# Altium PCB PCB2.PcbDoc (part 2 of 2)
Units mm, origin at the board's own origin, x right, y up, seen from the top; angles counter-clockwise.
Board outline 392.94 x 181.74 mm, 2 copper layers (Top Layer, Bottom Layer); 104 components, 82 nets, 455 pads, 733 vias.
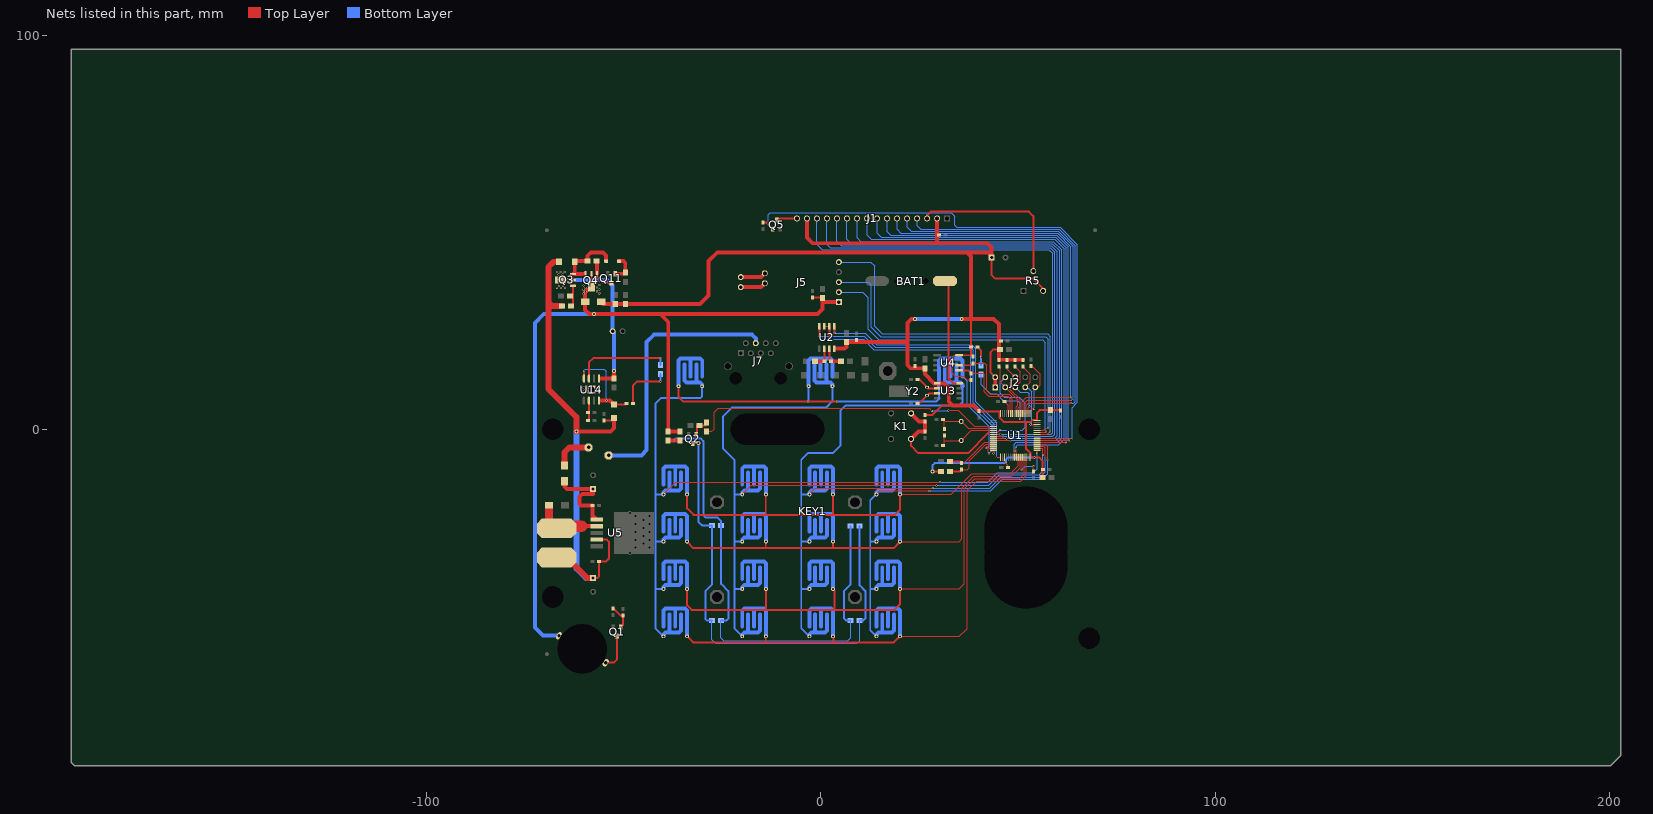
[diagram p2: the nets of this part, all layers, seen from the top]

## Via types
v1: diameter 0.5, hole 0.3, Top Layer to Bottom Layer, tented both sides, 719 vias
v2: diameter 1, hole 0.5, Top Layer to Bottom Layer, tented both sides, 9 vias
v3: diameter 1, hole 0.7, Top Layer to Bottom Layer, tented both sides, 5 vias

## Nets (pads, with @x,y where several pads share a name; then routed paths per layer and width w, separated by ;. In a path a pad name is that pad's centre, name@x,y a point inside that pad or via, vN(x,y) a via of type N, cw(c..) or ccw(c..) an arc to the next point about the centre after c; other vN are vias at no path point) (continued)
I2C1_SCL: R12.1 U1.58 U4.6 | length 24.9
  Top Layer w0.254: R12.1@38.6,16.764 41.536,16.764 42,16.3 42,9.8 42.9,8.9 47.8,8.9 48.526,8.174 U1.58@48.526,4.374
  Top Layer w0.5: U4.6@35.052,16.256 38.092,16.256 R12.1@38.6,16.764
I2C1_SDA: R13.1 U1.59 U4.5 | length 22.2
  Top Layer w0.254: R13.1@38.1,14.224 40.976,14.224 41.4,13.8 41.4,9.5 42.5,8.4 47.4,8.4 48.026,7.774 U1.59@48.026,4.026
  Top Layer w0.5: U4.5@35.052,14.986 37.338,14.986 R13.1@38.1,14.224
JTCK: J2.9 R8.1 U1.49 | length 15
  Top Layer w0.254: U1.49@53.026,4.026 53.026,4.817 53.416,5.207 v1(54.077,5.207) ; R8.1@53.226,16.126 53.474,16.126 55.6,14 55.6,11.3 54.968,10.668 J2.9@54.356,10.668
  Bottom Layer w0.254: v1(54.077,5.207) 54.077,10.389 J2.9@54.356,10.668
JTDI: J2.5 R6.2 U1.50 | length 15.7
  Top Layer w0.254: R6.2@49.162,15.999 50.5,14.661 50.5,11.892 J2.5@49.276,10.668 ; U1.50@52.526,4.026 52.526,5.434 v1(52.832,5.74)
  Bottom Layer w0.254: J2.5@49.276,10.668 50.495,9.449 52.4,9.449 52.832,9.017 v1(52.832,5.74)
JTDO: J2.6 R4.2 U1.55 | length 14.6
  Top Layer w0.254: R4.2@47.13,15.999 47.13,15.354 J2.6@49.276,13.208 48,11.932 48,10.1 50.5,7.6 50.5,5.9 50.026,5.426 U1.55@50.026,4.026
JTMS: J2.7 R7.2 U1.46 | length 19
  Top Layer w0.254: R7.2@51.194,15.999 51.194,15.906 53.1,14 53.1,11.952 J2.7@51.816,10.668 ; v1(53.1,1.2) 53.126,1.226 U1.46@54.826,1.226
  Bottom Layer w0.254: J2.7@51.816,10.668 52.299,10.668 53.467,9.5 53.467,1.567 v1(53.1,1.2)
JTRST: J2.3 R3.2 U1.56 | length 14.1
  Top Layer w0.254: R3.2@45.098,15.999 45.5,15.597 45.5,11.904 J2.3@46.736,10.668 46.736,10.664 49.9,7.5 49.9,6.1 49.526,5.726 U1.56@49.526,4.026
KEY_LED: R19.1 U1.4 | length 79.8
  Top Layer w0.254: R19.1@-29.08,-0.532 -27.632,-0.532 -27.1,0 -27.1,4.3 -26,5.4 27.4,5.4 v1(28.1,4.7) ; v1(32.4,4.8) 34.8,4.8 38.874,0.726 U1.4@43.726,0.726
  Bottom Layer w0.254: v1(28.1,4.7) 32.3,4.7 v1(32.4,4.8)
LCD_LED: Q5.1 R67.2 U1.39 | length 147.6
  Top Layer w0.254: U1.39@54.826,-2.274 v1(63.726,-2.274)
  Top Layer w0.5: R67.2@-14.732,52.451 -13.843,52.451 v1(-13.406,52.014) Q5.1@-12.192,50.8
  Bottom Layer w0.254: v1(-13.406,52.014) -13.406,53.594 -13.406,54.394 -12.9,54.9 33.1,54.9 33.9,54.1 33.9,51.8 34.452,51.248 60.626,51.248 65.047,46.827 65.047,6.829 63.726,5.508 v1(63.726,-2.274) ; v1@-13.4,51.9 v1@-13.4,52.014
NetBAT1_1: BAT1.1 U3.8 | length 28.4
  Top Layer w0.5: BAT1.1@31.462,37.592 32.4,36.654 32.4,12.8 33.516,11.684 U3.8@35.164,11.684
NetBEEP1_2: BEEP1.2 Q1.3 | length 10.1
  Top Layer w0.5: BEEP1.2@-54.585,-59.174 -52.574,-59.174 -51.711,-58.311 -51.711,-53.9 ; -51.711,-54.961 Q1.3@-51.711,-52.457
NetC1_1: C1.1 R2.1 U1.5 Y1.1 | length 15.9
  Top Layer w0.254: C1.1@30.988,2.54 C1.1@31.284,2.244 ; R2.1@31.284,0.084 C1.1@31.284,2.244 ; U1.5@43.726,0.226 37.366,0.226 Y1.1@35.56,2.032 31.496,2.032 C1.1@31.284,2.244
NetC6_1: C6.1 R2.2 U1.6 Y1.2 | length 16.1
  Top Layer w0.254: C6.1@30.988,-4.064 31.284,-3.768 R2.2@31.284,-1.567 ; 31.332,-2.848 Y1.2@35.56,-2.848 38.134,-0.274 U1.6@43.726,-0.274
NetC8_1: C8.1 L2.2 U1.13 | length 14.8
  Top Layer w0.254: C8.1@35.668,-10.216 36.484,-10.216 36.55,-10.15 ; 36.616,-10.216 37.084,-10.216 37.6,-9.7 37.6,-8 41.826,-3.774 U1.13@43.726,-3.774
  Top Layer w0.5: L2.2@32.766,-10.668 35.216,-10.668 C8.1@35.668,-10.216
NetC8_2: C8.2 L1.2 U1.12 | length 13.3
  Top Layer w0.254: C8.2@35.668,-8.565 35.835,-8.565 36.235,-8.565 41.526,-3.274 U1.12@43.726,-3.274
  Top Layer w0.5: L1.2@32.766,-8.128 35.231,-8.128 C8.2@35.668,-8.565
NetC17_2: C17.2 U3.2 Y2.2 | length 5.9
  Top Layer w0.5: C17.2@24.511,12.7 24.892,12.7 Y2.2@26.924,10.668 27.178,10.414 U3.2@29.464,10.414
NetC22_2: C22.2 U3.3 Y2.1 | length 6
  Top Layer w0.5: C22.2@24.511,6.604 24.892,6.604 Y2.1@26.924,8.636 27.432,9.144 U3.3@29.464,9.144
NetC24_1: C24.1 C25.2 D4.2 U5.1 | length 23.1
  Top Layer w1: D4.2@-65.024,-13.194 -65.024,-14.478 -64.374,-15.128 C24.1@-57.772,-15.128 -57.772,-16.345 -58.471,-16.345 -60.541,-16.345 -61.189,-16.993 -61.189,-18.898 -60.826,-19.26 C25.2@-57.919,-19.26 -57.919,-21.837 U5.1@-56.896,-22.86
  Top Layer w1.5: D4.2@-65.024,-13.194 D4.2@-65.01,-13.208
NetD4_1: D4.1 F14.2 | length 9.9
  Top Layer w1.5: D4.1@-65.024,-9.144 -65.024,-5.817 -63.795,-4.588 F14.2@-58.938,-4.588
NetD5_2: D5.2 L3.1 U5.2 | length 16.8
  Top Layer w1: -60.69,-24.56 U5.2@-56.896,-24.56
  Top Layer w2: D5.2@-68.954,-19.5 -68.954,-23.186 L3.1@-67.032,-25.108
  Top Layer w3: L3.1@-67.032,-25.108 -66.484,-24.56 -60.69,-24.56
NetD22_1: D22.1 Q11.1 R73.2 | length 6.9
  Top Layer w1: Q11.1@-52.166,39.462 -49.88,39.462 R73.2@-49.626,39.716 -49.626,42.226 -50.072,42.672 D22.1@-51.206,42.672
NetF1_1: F1.1 R11.1 U2.7 | length 5.9
  Top Layer w0.5: U2.7@2.122,20.484 2.122,17.69 R11.1@2.54,17.272
  Top Layer w1: R11.1@2.54,17.272 F1.1@5.08,17.272
NetF2_1: F2.1 R11.2 U2.6 | length 5.6
  Top Layer w0.5: U2.6@0.852,20.484 0.852,17.309 R11.2@0.889,17.272
  Top Layer w1: F2.1@-1.524,17.272 R11.2@0.889,17.272
NetJ1_3: J1.3 R5.2 | length 42.5
  Top Layer w0.5: J1.3@26.92,53.5 26.92,54.32 27.8,55.2 52.7,55.2 53.848,54.052 R5.2@53.848,40.132
NetJ1_16: J1.16 Q5.3 | length 5.3
  Top Layer w0.5: Q5.3@-11.239,53.086 -10.826,53.5 J1.16@-6.1,53.5
NetLED1_1: LED1.1 LED2.1 LED3.1 LED4.1 R14.2 R15.2 | length 130.5
  Top Layer w1: R15.2@-38.732,-2.818 v1(-37.3,-2.818) R14.2@-36.192,-2.818
  Bottom Layer w0.254: LED4.1@-25.4,-48.45 -25.4,-52.9 -24.7,-53.6 6.8,-53.6 7.5,-52.9 LED3.1@7.5,-48.45
  Bottom Layer w0.5: v1(-37.3,-2.818) -36.782,-2.3 -30.5,-2.3 -29.8,-3 -29.8,-21.8 -29.2,-22.4 -26.2,-22.4 -25.3,-23.3 LED2.1@-25.3,-24.384 -25.3,-39.2 -23.5,-41 -23.5,-48 -23.95,-48.45 LED4.1@-25.4,-48.45 ; LED3.1@7.5,-48.45 6.35,-48.45 5.8,-47.9 5.8,-41 7.5,-39.3 LED1.1@7.5,-24.45
NetLED1_2: LED1.2 LED2.2 LED3.2 LED4.2 Q2.3 | length 125.6
  Top Layer w0.5: Q2.3@-32.429,-3.6 -32.529,-3.5 v2(-31,-3.5)
  Bottom Layer w0.254: LED4.2@-27.686,-48.45 -27.686,-53.314 -26.7,-54.3 9.086,-54.3 9.786,-53.6 LED3.2@9.786,-48.45
  Bottom Layer w0.5: v2(-31,-3.5) -31,-23.5 -30.116,-24.384 LED2.2@-27.586,-24.384 -27.586,-39.286 -29.3,-41 -29.3,-48.1 -28.95,-48.45 LED4.2@-27.686,-48.45 ; LED3.2@9.786,-48.45 10.75,-48.45 11.3,-47.9 11.3,-41.1 9.786,-39.586 LED1.2@9.786,-24.45
NetLED5_1: LED5.1 R18.1 | length 4.9
  Top Layer w0.5: R18.1@39.751,20.828 40.64,19.939 v1(40.64,18.3)
  Bottom Layer w0.5: LED5.1@40.64,16.256 v1(40.64,18.3)
NetLED5_2: LED5.2 U1.54 | length 20
  Top Layer w0.254: v1(50.526,2.6) U1.54@50.526,4.026
  Bottom Layer w0.254: LED5.2@40.64,13.97 40.64,11.26 42.9,9 44.534,9 46.234,7.3 49.9,7.3 50.526,6.674 v1(50.526,2.6)
NetLED10_1: LED10.1 R76.2 | length 13.8
  Top Layer w0.5: R76.2@-47.625,6.604 -47.625,8.625 -47.625,11.175 -46.64,12.16 v1(-40.64,12.16)
  Bottom Layer w0.5: v1(-40.64,12.16) LED10.1@-40.64,14
NetLED10_2: LED10.2 U14.7 | length 24.5
  Top Layer w0.5: U14.7@-58.836,12.886 -58.836,16.964 -57.74,18.06 v1(-40.64,18.06)
  Bottom Layer w0.5: LED10.2@-40.64,16.286 v1(-40.64,18.06)
NetQ1_1: Q1.1 R16.2 R17.2 | length 6.7
  Top Layer w0.5: R17.2@-52.79,-45.472 -52.528,-45.472 -50.75,-47.25 R16.2@-50.25,-47.25 ; Q1.1@-50.758,-50.171 -50.25,-49.663 R16.2@-50.25,-47.25 ; R16.2@-50,-47.25 R16.2@-50.25,-47.25
NetQ2_1: Q2.1 R19.2 R20.2 | length 4.7
  Top Layer w0.5: Q2.1@-31.605,-1.242 -31.493,-1.131 -31.493,0.992 -29.207,0.992 R19.2@-29.08,1.119
NetQ3_1: Q3.1 R71.1 R72.2 | length 5.3
  Top Layer w0.5: R71.1@-63.342,31.334 -62.834,31.842 -62.834,34.636 -62.834,34.9 Q3.1@-62.834,36.414
NetQ4_1: Q4.1 Q11.3 R74.1 | length 8.4
  Top Layer w0.5: Q4.1@-56.738,39.462 -56.738,38.538 -55.376,37.176 Q11.3@-53.119,37.176
  Top Layer w1: R74.1@-56.896,42.672 -56.738,42.514 Q4.1@-56.738,39.462
NetR1_1: R1.1 U1.60 | length 3.5
  Top Layer w0.254: R1.1@46.5,7.112 47.526,6.086 U1.60@47.526,4.026
NetR9_1: R9.1 U1.28 | length 8.1
  Top Layer w0.254: v1(50.8,-10.3) 51.026,-10.074 U1.28@51.026,-7.074 ; R9.1@53.848,-10.668 v1(53.848,-9.348)
  Bottom Layer w0.254: v1(50.8,-10.3) 51.752,-9.348 v1(53.848,-9.348)
NetR75_1: R75.1 R76.1 U14.4 U14.8 | length 22.8
  Top Layer w0.5: U14.8@-60.106,12.886 v1(-60.106,14.494) ; R75.1@-52.486,6.282 -50.7,6.282 -49.598,6.282 R76.1@-49.276,6.604
  Top Layer w1: -55.9,7.3 -53.503,7.3 R75.1@-52.486,6.282
  Bottom Layer w0.254: v1(-60.106,14.494) -60.106,14.994 -59.8,15.3 -55,15.3 -54.4,14.7 v1(-54.4,7.3)
NetR77_1: R77.1 R78.1 U14.2 | length 5.2
  Top Layer w0.5: R78.1@-59.09,2.218 -58.836,2.472 U14.2@-58.836,7.298
PA0: KEY1.33 KEY1.35 KEY1.37 U1.14 | length 100.3
  Top Layer w0.254: v1(41.8,-4.7) 42.226,-4.274 U1.14@43.726,-4.274
  Top Layer w0.5: KEY1.37@-36.107,10.929 -36.107,8.207 -35,7.1 v1(-3.3,7.1) v1(4.1,7.1)
  Bottom Layer w0.254: 35.893,13.429 37.1,12.222 37.1,6.2 42.7,0.6 42.7,-4.4 42.4,-4.7 v1(41.8,-4.7)
  Bottom Layer w0.5: v1(-3.3,7.1) -3.107,7.293 KEY1.35@-3.107,10.929 ; v1(4.1,7.1) 29.3,7.1 29.893,7.693 KEY1.33@29.893,10.929
PA9_U1_TX: J5.2 U1.42 | length 87.3
  Top Layer w0.254: U1.42@54.826,-0.774 56.826,-0.774 v1(57.1,-0.5)
  Bottom Layer w0.254: J5.2@4.557,34.798 10.602,34.798 12,33.4 12,25.4 14.7,22.7 56.2,22.7 56.9,22 56.9,-0.3 v1(57.1,-0.5)
PA10_U1_RX: J5.3 U1.43 | length 90.9
  Top Layer w0.254: U1.43@54.826,-0.274 56.426,-0.274 57,0.3 v1(57.6,0.3)
  Bottom Layer w0.254: J5.3@4.557,37.338 12.062,37.338 12.8,36.6 12.8,25.9 15.2,23.5 57,23.5 57.6,22.9 v1(57.6,0.3)
PB0: KEY1.1 KEY1.3 KEY1.5 KEY1.7 U1.26 | length 108.3
  Top Layer w0.254: KEY1.1@20.043,-16.471 33.029,-16.471 38.2,-11.3 48,-11.3 50.026,-9.274 U1.26@50.026,-7.074
  Top Layer w0.5: KEY1.7@-33.957,-16.471 -33.957,-20.043 -32.3,-21.7 -14,-21.7 ; KEY1.5@-14,-16.514 -14,-21.7 ; 3.043,-21.657 KEY1.3@3.043,-16.471 ; KEY1.1@20.043,-16.471 20.043,-20.4 18.743,-21.7 -14,-21.7
PB1: KEY1.9 KEY1.11 KEY1.13 KEY1.15 U1.27 | length 107.2
  Top Layer w0.254: KEY1.9@20.043,-28.471 35.029,-28.471 35.7,-27.8 35.7,-14.9 38.7,-11.9 48.3,-11.9 50.526,-9.674 U1.27@50.526,-7.074
  Top Layer w0.5: KEY1.15@-33.957,-28.471 -32.328,-30.1 -14,-30.1 ; KEY1.13@-14,-28.514 -14,-30.1 ; KEY1.11@3.1,-28.528 3.1,-30.1 ; KEY1.9@20.214,-28.3 KEY1.9@20.043,-28.471 18.414,-30.1 3.1,-30.1 ; -14,-30.1 3.1,-30.1
PB10: KEY1.17 KEY1.19 KEY1.21 KEY1.23 U1.29 | length 135.7
  Top Layer w0.254: KEY1.17@20.043,-40.471 35.029,-40.471 36.4,-39.1 36.4,-15.1 39,-12.5 50.326,-12.5 51.526,-11.3 U1.29@51.526,-7.074
  Top Layer w0.5: KEY1.23@-33.957,-40.471 -33.957,-44.643 -32.8,-45.8 3.4,-45.8 ; -13.957,-45.757 KEY1.21@-13.957,-40.471 ; KEY1.19@3.043,-40.471 3.4,-40.828 3.4,-45.8 ; KEY1.17@20.043,-40.471 20.043,-44.3 18.543,-45.8 3.4,-45.8
PB11: KEY1.25 KEY1.27 KEY1.29 KEY1.31 U1.30 | length 132.1
  Top Layer w0.254: KEY1.25@20.043,-52.471 35.129,-52.471 37.1,-50.5 37.1,-15.5 39.5,-13.1 50.626,-13.1 52.026,-11.7 U1.30@52.026,-7.074
  Top Layer w0.5: KEY1.31@-33.957,-52.471 -32.428,-54 -14,-54 ; KEY1.29@-14,-52.514 -14,-54 ; KEY1.27@3.2,-52.628 3.2,-54 ; KEY1.25@20.043,-52.471 18.514,-54 3.2,-54 ; -14,-54 3.2,-54
PB12: KEY1.8 KEY1.16 KEY1.24 KEY1.32 KEY1.38 U1.33 | length 183.3
  Top Layer w0.254: KEY1.8@-39.957,-16.471 -36.886,-13.4 v1(30.2,-13.4) ; v1(54.826,-6) U1.33@54.826,-5.274
  Bottom Layer w0.254: v1(30.2,-13.4) 42.3,-13.4 44.7,-11 53.8,-11 54.826,-9.974 v1(54.826,-6)
  Bottom Layer w0.5: -41.971,-16.471 KEY1.8@-39.957,-16.471 ; KEY1.32@-39.957,-52.471 -42,-50.428 -42,-40.471 ; KEY1.24@-39.957,-40.471 -42,-40.471 ; KEY1.16@-39.957,-28.471 -42,-28.471 ; KEY1.38@-30.107,10.929 -30.107,8.393 -30.6,7.9 -40.6,7.9 -42,6.5 -42,-28.471 ; -42,-40.471 -42,-28.471
PB13: KEY1.6 KEY1.14 KEY1.22 KEY1.30 KEY1.36 U1.34 | length 182.4
  Top Layer w0.254: KEY1.6@-19.957,-16.471 -17.686,-14.2 v1(29.3,-14.2) ; U1.34@54.826,-4.774 56.074,-4.774 56.3,-5 v1(56.3,-6.5)
  Bottom Layer w0.254: v1(29.3,-14.2) 42.5,-14.2 45.2,-11.5 55.3,-11.5 56.3,-10.5 v1(56.3,-6.5)
  Bottom Layer w0.5: -21.871,-28.471 KEY1.14@-19.957,-28.471 ; -21.829,-16.471 KEY1.6@-19.957,-16.471 ; -21.771,-40.471 KEY1.22@-19.957,-40.471 ; KEY1.30@-19.957,-52.471 -21.9,-50.528 -21.9,-16.471 -21.9,-7.8 -24.9,-4.8 -24.9,3.2 -22.5,5.6 1.4,5.6 2.9,7.1 KEY1.36@2.9,10.922
PB14: KEY1.4 KEY1.12 KEY1.20 KEY1.28 KEY1.34 U1.35 | length 178.1
  Top Layer w0.254: KEY1.4@-2.957,-16.471 -1.386,-14.9 v1(28.4,-14.9) ; U1.35@54.826,-4.274 56.474,-4.274 56.9,-4.7 v1(56.9,-7.2)
  Bottom Layer w0.254: v1(28.4,-14.9) 42.8,-14.9 45.6,-12.1 55.6,-12.1 56.9,-10.8 v1(56.9,-7.2)
  Bottom Layer w0.5: -4.971,-16.471 KEY1.4@-2.957,-16.471 ; -4.871,-40.471 KEY1.20@-2.957,-40.471 ; -4.871,-28.471 KEY1.12@-2.957,-28.471 ; KEY1.28@-2.957,-52.471 -5,-50.428 -5,-7.7 -3.3,-6 3,-6 4.9,-4.1 4.9,4.7 6.2,6 35,6 35.893,6.893 KEY1.34@35.893,10.929
PB15: KEY1.2 KEY1.10 KEY1.18 KEY1.26 U1.36 | length 95.7
  Top Layer w0.254: KEY1.2@14.043,-16.471 14.914,-15.6 v1(27.5,-15.6) ; U1.36@54.826,-3.774 56.874,-3.774 57.5,-4.4 v1(57.5,-7.8)
  Bottom Layer w0.254: v1(27.5,-15.6) 43.1,-15.6 46,-12.7 56,-12.7 57.5,-11.2 v1(57.5,-7.8)
  Bottom Layer w0.5: 12.529,-28.471 KEY1.10@14.043,-28.471 ; KEY1.18@14.014,-40.5 12.5,-40.5 ; KEY1.26@14.043,-52.471 12.5,-50.928 12.5,-40.5 ; KEY1.2@14.043,-16.471 12.5,-18.014 12.5,-40.5
PC0: J1.14 U1.8 | length 128.9
  Top Layer w0.254: U1.8@43.726,-1.274 v1(45.445,-1.274)
  Bottom Layer w0.254: -1.02,52.635 -1.02,51.8 ; J1.14@-1.02,53.5 -1.02,51.8 ; v1(45.445,-1.274) 58.4,-1.274 58.8,-0.874 58.8,44.6 57.8,45.6 0.3,45.6 -1.02,46.92 -1.02,51.8
PC1: J1.13 U1.9 | length 128.2
  Top Layer w0.254: U1.9@43.726,-1.774 v1(46.148,-1.774)
  Bottom Layer w0.254: 1.52,52.635 1.52,51.6 ; J1.13@1.52,53.5 1.52,51.6 ; v1(46.148,-1.774) 58.826,-1.774 59.308,-1.292 59.308,44.892 58.092,46.108 2.392,46.108 1.52,46.98 1.52,51.6
PC2: J1.12 U1.10 | length 127.7
  Top Layer w0.254: U1.10@43.726,-2.274 v1(47.053,-2.274)
  Bottom Layer w0.254: 4.06,52.635 4.06,50.8 ; J1.12@4.06,53.5 4.06,50.8 ; v1(47.053,-2.274) 59.226,-2.274 59.9,-1.6 59.9,45.1 58.384,46.616 5.084,46.616 4.06,47.64 4.06,50.8
PC3: J1.11 U1.11 | length 126.7
  Top Layer w0.254: U1.11@43.726,-2.774 v1(48.128,-2.774)
  Bottom Layer w0.254: 6.6,52.635 6.6,50.7 ; J1.11@6.6,53.5 6.6,50.7 ; v1(48.128,-2.774) 59.626,-2.774 60.5,-1.9 60.5,45.3 58.676,47.124 7.676,47.124 6.6,48.2 6.6,50.7
PC4: J1.10 U1.24 | length 123.7
  Top Layer w0.254: U1.24@49.026,-7.074 v1(49.026,-5.5)
  Bottom Layer w0.254: 9.14,50.268 9.14,50.44 ; 9.14,52.635 9.14,51 ; J1.10@9.14,53.5 9.14,51 ; v1(49.026,-5.5) 49.026,-3.774 49.5,-3.3 60,-3.3 61.1,-2.2 61.1,45.5 58.968,47.632 10.068,47.632 9.14,48.56 9.14,50.44 ; 9.14,50.44 9.14,51
PC5: J1.9 U1.25 | length 121.6
  Top Layer w0.254: U1.25@49.526,-7.074 v1(49.526,-4.779)
  Bottom Layer w0.254: 11.68,52.635 11.68,50.8 ; J1.9@11.68,53.5 11.68,50.8 ; v1(49.526,-4.779) 49.526,-4.274 49.9,-3.9 60.3,-3.9 61.7,-2.5 61.7,45.8 59.3,48.2 12.7,48.2 11.68,49.22 11.68,50.8
PC6: J1.8 U1.37 | length 111.9
  Top Layer w0.254: U1.37@54.826,-3.274 61.974,-3.274 v1(62.2,-3.5)
  Bottom Layer w0.254: 14.22,52.635 14.22,51 ; J1.8@14.22,53.5 14.22,51 ; v1(62.2,-3.5) 62.208,-3.492 62.208,46.01 59.51,48.708 15.292,48.708 14.22,49.78 14.22,51
PC7: J1.7 U1.38 | length 109.4
  Top Layer w0.254: U1.38@54.826,-2.774 v1@62.9,-2.774
  Bottom Layer w0.254: 16.76,52.635 16.76,51.4 ; J1.7@16.76,53.5 16.76,51.4 ; v1(62.9,-2.8) 62.716,-2.616 62.716,46.284 59.784,49.216 17.7,49.216 16.76,50.156 16.76,51.4
PC10: J1.4 U1.51 | length 99.7
  Top Layer w0.254: U1.51@52.026,4.026 52.026,6.128 52.527,6.629 v1(63.4,6.629)
  Bottom Layer w0.254: 24.38,52.635 24.38,51.62 ; J1.4@24.38,53.5 24.38,51.62 ; v1(63.4,6.629) 64.129,6.629 64.539,7.039 64.539,46.616 60.415,50.74 25.26,50.74 24.38,51.62
PC11: J1.5 U1.52 | length 101.8
  Top Layer w0.254: U1.52@51.526,4.026 51.526,6.644 52.282,7.4 v1(63.8,7.4)
  Bottom Layer w0.254: 21.84,52.635 21.84,51.6 ; J1.5@21.84,53.5 21.84,51.6 ; v1(63.8,7.4) 63.8,7.608 64.031,7.839 64.031,46.406 60.205,50.232 22.868,50.232 21.84,51.26 21.84,51.6
PC12: J1.6 U1.53 | length 104.3
  Top Layer w0.254: U1.53@51.026,4.026 51.026,7.033 52.093,8.1 v1(63.4,8.1)
  Bottom Layer w0.254: 19.3,52.635 19.3,51.1 ; J1.6@19.3,53.5 19.3,51.1 ; v1(63.4,8.1) 63.4,46.318 59.994,49.724 20.276,49.724 19.3,50.7 19.3,51.1
R\E\A\D\Y/BUSY: J5.5 U1.41 | length 97.9
  Top Layer w0.254: U1.41@54.826,-1.274 57.326,-1.274 v1(58.1,-0.5)
  Bottom Layer w0.254: J5.5@4.557,42.418 12.682,42.418 13.6,41.5 13.6,26.2 15.6,24.2 57.5,24.2 58.2,23.5 v1@58.2,-0.4
RESET: C23.1 J2.4 K1.1 R10.1 U1.7 | length 63.5
  Top Layer w0.254: 42.35,-0.95 42.526,-0.774 U1.7@43.726,-0.774 44.826,-0.774 v1(45.4,-0.2)
  Top Layer w0.5: K1.1@22.86,-2.436 22.86,-4.16 24.7,-6 37.3,-6 42.35,-0.95
  Top Layer w1: K1.1@22.86,-2.436 24.788,-0.508 C23.1@26.416,-0.508 R10.1@26.416,2.032 24.892,2.032 K1.1@22.86,4.064
  Bottom Layer w0.254: v1(45.4,-0.2) 51.1,-0.2 51.8,0.5 51.8,6.6 50.3,8.1 46.5,8.1 45.5,9.1 45.5,11.972 J2.4@46.736,13.208
RS485_RE: U1.15 U2.2 U2.3 | length 72.9
  Top Layer w0.254: U2.3@0.852,26.184 U2.2@2.122,26.184 ; v1(42.6,-6.1) 42.4,-5.9 42.4,-5 42.626,-4.774 U1.15@43.726,-4.774
  Top Layer w0.5: v1(2.122,22.8) U2.2@2.122,26.184
  Bottom Layer w0.254: v1(2.122,22.8) 10.8,22.8 13.4,20.2 37.7,20.2 38,19.9 38,6.3 43.4,0.9 43.4,-5.3 v1(42.6,-6.1)
RS485_RX: U1.17 U2.1 | length 69.9
  Top Layer w0.254: v1(44.526,-7.074) U1.17@45.526,-7.074
  Top Layer w0.5: v1@3.392,24.4 U2.1@3.392,26.184
  Bottom Layer w0.254: v1(3.4,24.4) 11.2,24.4 14.2,21.4 38.2,21.4 39.2,20.4 39.2,7 44.526,1.674 v1(44.526,-7.074)
RS485_TX: U1.16 U2.4 | length 72.4
  Top Layer w0.254: v1@43.7,-6.1 v1(43.726,-6.074) U1.16@43.726,-5.274
  Top Layer w0.5: v1@-0.418,23.6 U2.4@-0.418,26.184
  Bottom Layer w0.254: v1(-0.4,23.6) 11,23.6 13.8,20.8 37.9,20.8 38.6,20.1 38.6,6.7 44,1.3 44,-5.8 v1(43.726,-6.074)
SPK+: J5.6 J6.1 | length 6.5
  Top Layer w1: J6.1@-20.32,38.608 -15.212,38.608 J5.6@-14.243,39.578
SPK-: J5.7 J6.2 | length 6.5
  Top Layer w1: J6.2@-20.32,36.068 -15.212,36.068 J5.7@-14.243,37.038
SR: U14.9
  other v1: -59.7,9.3 -56.1,9.3 -60.3,9.7 -56.7,9.7 -59.7,10.1 -56.1,10.1 -56.7,10.5 -60.3,10.6 -59.7,10.9 -56.1,10.9
V1: BEEP1.1 C0.2 C7.2 D23.1 J5.1 pad.24 pad.25 pad.26 pad.27 pad.28 pad.29 pad.30 pad.31 pad.32 pad.33 Q4.2 Q4.4 R14.1 R15.1 | length 213.8
  Top Layer w0.5: Q4.4@-58.238,36.262 Q4.2@-58.238,39.462 ; C0.2@-2.119,33.479 0.294,33.479 C7.2@0.421,33.352
  Top Layer w1: Q4.4@-58.238,36.262 -59.786,34.714 D23.1@-59.786,32.35 -59.786,30.286 -58.7,29.2 v2(-57.5,29.2) -40.7,29.2 ; R14.1@-36.192,-0.532 R15.1@-38.732,-0.532 -38.732,27.232 -40.7,29.2 ; C7.2@0.407,33.338 C7.2@0.421,33.352 0.421,32.258 ; J5.1@4.557,32.258 0.421,32.258 ; -40.7,29.2 -12.112,29.2 -0.893,29.2 0.421,30.514 0.421,32.258
  Bottom Layer w1: BEEP1.1@-66.45,-52.324 -70.476,-52.324 -72.5,-50.3 -72.5,27 -70.3,29.2 v2(-57.5,29.2)
VBAT: C51.1 J8.1 pad.14 pad.15 pad.16 pad.17 pad.18 pad.19 pad.20 pad.21 pad.22 pad.23 Q3.2 Q3.4 U14.5 | length 42.5
  Top Layer w1: Q3.4@-66.034,37.914 Q3.2@-62.834,37.914 ; U14.5@-56.1,12.886 C51.1@-52.486,12.886 v2(-52.486,14.814)
  Bottom Layer w1: v2(-64.2,37.914) -54.214,37.914 -52.832,36.532 J8.1@-52.832,24.892 -52.486,24.546 v2(-52.486,14.814)
VBT: D21.2 D22.2 Q3.3 Q4.3 R74.2 | length 17.5
  Top Layer w1: -60.114,39.414 Q3.3@-62.834,39.414 -62.44,39.808 D21.2@-62.44,42.51 -62.279,42.672 R74.2@-59.182,42.672 -59.182,44.018 -58.3,44.9 -55.3,44.9 -54.458,44.058 D22.2@-54.458,42.672
VCC+3.3V: C2.1 C3.1 C4.2 C5.2 C9.2 C10.2 C11.2 C12.2 C13.2 C14.2 C15.1 C16.1 C20.2 C21.2 C27.1 C28.1 D23.2 J1.2 J1.15 J2.1 J2.2 L2.1 R3.1 R4.1 R5.3 R6.1 R7.1 R10.2 R12.2 R13.2 R18.2 U1.19 U1.32 U1.48 U1.64 U2.8 U3.1 U4.8 | length 429.5
  Top Layer w0.254: U4.8@35.052,18.796 33.796,18.796 33.2,18.2 33.2,14.3 34,13.5 36.1,13.5 37.027,12.573 R13.2@38.1,12.573 ; U1.19@46.526,-7.074 46.526,-8.226 v1(46.887,-8.587) 47.371,-9.071 C11.2@47.371,-9.652 ; U1.48@54.8,2.226 U1.48@54.826,2.226
  Top Layer w0.5: R10.2@26.416,3.683 28.283,3.683 30.7,6.1 33.4,6.1 34,6.1 ; v2(28.232,-10.668) L2.1@30.48,-10.668 ; U4.8@35.052,18.796 38.219,18.796 38.1,18.915 R18.2@38.1,20.828 38.1,27.9 ; C12.2@40.132,4.699 40.331,4.5 45.3,4.5 45.3,2.9 46.3,1.9 52,1.9 ; C3.1@43.292,43.548 43.292,39.108 44.1,38.3 53.688,38.3 56.348,35.64 R5.3@56.348,35.132 ; J2.2@44.196,13.208 43,14.404 43,19.6 43.702,20.302 C5.2@45.098,20.302 ; C9.2@56.134,-12.192 56.134,-7.934 55.3,-7.1 v1(54.1,-7.1) 53.2,-7.1 53.2,-6.1 52,-4.9 52,1.9 ; C14.2@60.78,4.731 60.653,4.858 C10.2@58.24,4.858 55.458,4.858 54.8,4.2 54.8,2.4 53.7,2.4 53.2,1.9 52,1.9
  Top Layer w1: D23.2@-55.736,32.35 -55.228,31.842 C28.1@-52.166,31.842 C27.1@-49.626,31.842 -30.658,31.842 -28.5,34 -28.5,42.7 -26.3,44.9 37,44.9 ; -3.56,49.66 -3.56,52.584 ; J1.15@-3.56,53.5 -3.56,52.584 ; 3.8,20.5 6,20.5 6.44,20.94 C15.1@6.44,22.12 21.78,22.12 ; v2(23.8,28) 22.9,28 21.9,27 21.9,16.3 22.706,15.494 C21.2@26.416,15.494 26.416,13.984 28.716,11.684 U3.1@29.464,11.684 31.316,11.684 32.4,10.6 32.4,7.1 33.4,6.1 38.731,6.1 C12.2@40.132,4.699 ; 29.46,47.44 29.46,52.584 ; 29.46,49.6 29.46,52.584 ; J1.2@29.46,53.5 29.46,52.584 ; v2(35.7,28) 43.8,28 45.098,26.702 45.098,20.302 R3.1@45.098,17.65 R4.1@47.13,17.65 R6.1@49.162,17.65 R7.1@51.194,17.65 ; 38.1,28.4 38.1,43.8 37,44.9 ; C3.1@43.292,43.548 C3.1@43.292,44.056 ; J2.1@44.196,10.668 J2.2@44.196,13.208 ; -3.56,52.584 -3.56,48.66 -2.1,47.2 42.2,47.2 43.292,46.108 C3.1@43.292,44.056 ; 37,44.9 42.448,44.9 C3.1@43.292,44.056
  Bottom Layer w0.5: v2(28.232,-10.668) 28.232,-9.168 28.813,-8.587 v1(46.887,-8.587) 46.887,-7.713 47.5,-7.1 v1(54.1,-7.1)
  Bottom Layer w1: v2(23.8,28) v2(35.7,28)
VCC+5V: C31.1 C32.2 C50.1 D21.1 L3.2 R71.2 R75.2 U5.4 | length 133.5
  Top Layer w0.5: C31.1@-57.772,-37.704 -56.703,-37.704 -56.261,-37.262 C32.2@-56.261,-33.528 -54.528,-33.528 -53.75,-32.75 -53.75,-28.5 -54.29,-27.96 U5.4@-56.896,-27.96 ; C50.1@-55.026,2.218 -53.121,2.218 R75.2@-52.486,2.853
  Top Layer w1: v2(-62,-0.5) -53.3,-0.5 -52.486,0.314 R75.2@-52.486,2.114
  Top Layer w1.5: L3.2@-67.032,-32.508 -64.454,-32.508 -59.258,-37.704 C31.1@-57.772,-37.704 ; D21.1@-66.39,42.51 -67.79,42.51 -69.1,41.2 -69.1,32.2 ; R71.2@-65.628,31.334 -68.234,31.334 -69.1,32.2 ; v2(-62,-0.5) -62,3.1 -69.1,10.2 -69.1,32.2
  Bottom Layer w1.5: v2(-62,-0.5) -62,-35.3 -59.596,-37.704 C31.1@-57.772,-37.704
VCC+12V: F14.1 J7.4 | length 67.6
  Bottom Layer w1: F14.1@-53.838,-6.588 -48.288,-6.588 -45.552,-6.588 -44.2,-5.236 -44.2,22.119 -42.319,24 -17.5,24 -16.51,23.01 J7.4@-16.51,21.844
pads on no net: BAT1.0 J2.8 J7. J7.1 J7.2 J7.3 J7.6 U1.1 U1.2 U1.20 U1.21 U1.22 U1.23 U1.40 U1.44 U1.45 U14.6

## Polygon pours and split planes (outlines as drawn)
GND on Top Layer "Bottom Layer-No Net" (solid, remove dead copper, pour order 1000): -72.5,55 -74,53.513 -74,51.034 -74,47.068 -74,-60.509 -73,-61.5 -70,-61.5 -49.5,-61.5 -48.5,-60.509 -48.5,-58.03 -48.5,-57.038 -47,-55.551 -46,-55.551 47,-55.551 48.5,-57.038 48.5,-59.021 48.5,-60.509 49.5,-61.5 51,-61.5 73,-61.5 74,-60.509 74,-59.021 74,54.009 73,55
GND on Bottom Layer "Bottom Layer-No Net" (solid, remove dead copper, pour order 1001): -72.5,55 -74,53.513 -74,-60.509 -73,-61.5 -49.5,-61.5 -48.5,-60.509 -48.5,-57.038 -47,-55.551 47,-55.551 48.5,-57.038 48.5,-60.509 49.5,-61.5 52,-61.5 73,-61.5 74,-60.509 74,-58.03 74,54.009 73,55

## Other copper
Top Layer:
  region net VCC+3.3V: 52.2,1.2 52.65,1.65 52.4,1.9 51.95,1.45
  region net VCC+3.3V: 51.75,1.15 52,1.4 51.45,1.95 51.2,1.7
  region net VCC+3.3V: 53.65,-7.15 53.9,-6.9 53.45,-6.45 53.2,-6.7
  region net VCC+3.3V: 55.1,2.1 55.35,2.35 55,2.7 54.75,2.45
  region net VCC+3.3V: 45.1,3.6 45.526,4.026 44.826,4.726 44.4,4.3
  rectangle net VCC+3.3V: 40.2,4.5 45.6,4.9
  rectangle net SR: -60.7,8.7 -55.6,11.4
  rectangle net VBAT: -67.4,35.5 -64.2,40.3
  rectangle net V1: -60.5,34.1 -55.8,36.9
Bottom Layer:
  rectangle net SR: -64.7,7.5 -55.5,12.7
  rectangle net VBAT: -67.4,35.5 -64.2,40.3
  rectangle net V1: -60.6,34.1 -55.8,36.9

## Silkscreen, mask and mechanical layers (free items; w line width, h text height)
Top Overlay:
  circle w0.1: c-57.3,24.6 r0.922
  circle w0.254: c42.6,25.712 r2.413
  circle w0.1: c16.9,14.8 r3
  circle w0.1: c-16.9,14.8 r3
  circle w0.1: c8.6,-42.5 r2.5
  circle w0.1: c-26.4,-42.5 r2.5
  circle w0.1: c8.6,-18.5 r2.5
  circle w0.1: c-26.4,-18.5 r2.5
  circle w0.254: c52,-25 r21
  circle w0.1: c-60.5,-55.6 r6.5
  circle w0.1: c-69,-51.3 r1.404
  lines w0.254: 25,5.2 25,-25 -25,-25 -25,25 25,25 25,13.9
  lines w0.5: 43.4,12 55.1,12 ; 47,9.1 51.6,9.1
  lines w1.5: 34.1,-4.4 34.1,3.6 ; 37,-4.4 37,3.6
  lines w2: -72,-28.8 -62,-28.8
  text "IO" at 7.3,43.4 h1 r270
  text "GND" at 7.3,41.5 h1 r270
  text "RX" at 7.3,38.2 h1 r270
  text "SPK" at -24.1,36.3 h1 r90
  text "TX" at 7.3,35.7 h1 r270
  text "VCC" at 7.2,33.5 h1 r270
  text "CONT" at 51.3,31.6 h1.5
  text "BAT" at -46.8,24.1 h1.5
  text "+" at -56.4,23.7 h2
  text "Security terminal V1.1" at -22.7,-10.4 h2.7
  text "20141217" at -5.9,-14.1 h2
  text "+" at -68.5,-53.1 h3 r60
Bottom Overlay:
  circle w0.254: c22.6,37.2 r4.5
  circle w0.254: c-4.5,37.2 r4.5
  circle w0.254: c-31.4,37.2 r4.5
  lines w0.254: -58.5,49.6 -58.5,24.6 58.5,24.6 58.5,49.6 ; -51.54,-44.831 -50.39,-44.831 ; -50,24.85 -50,49.85 ; -49.55,-48 -49.55,-4.9 26.51,-4.9 26.51,-56 ; -48.35,-47.95 -48.35,-23.2 -48.35,-6.1 19,-6.1 ; -45.844,12.856 41.4,12.856 ; -44.156,17.356 39.9,17.356 ; -27.05,-55.1 25.31,-55.1 25.31,-15.9 25.31,-6.3 ; 50,24.35 50,49.35
  lines w1.5: 23.8,28 35.5,28
Bottom Solder:
  rectangle: -64.7,7.5 -60.9,12.7
Mechanical 1:
  lines w0.254: 47.719,-61.219 47.5,-61 ; -75,-61 -73.5,-62.5 -49,-62.5 ; -75,-61 -75,-61 ; -75,-61 -75,54 -73,56 73.5,56 75,54.5 75,-61 73.5,-62.5 ; -49,-62.5 -48.625,-62.125 -47.875,-61.375 -47.5,-61 -47.5,-57.5 -46.25,-56.25 46,-56.25 47.5,-57.75 47.5,-61 ; -49,-62.5 -49,-62.5 ; 47.5,-61 49,-62.5 ; 49,-62.5 49,-62.5 ; 49,-62.5 73.5,-62.5 ; 73.5,-62.5 73.5,-62.5

## Text inside footprints (layer, text, board x,y; h text height)
KEY1: Bottom Overlay "F4" at -30.836,-49.555 h1; Bottom Overlay "F3" at -31.064,-37.338 h1; Bottom Overlay "F2" at -30.886,-25.349 h1; Bottom Overlay "F1" at -30.988,-13.386 h1; Bottom Overlay "#" at -11.811,-48.971 h1; Bottom Overlay "0" at 5.105,-49.2 h1; Bottom Overlay "*" at 21.895,-49.149 h1; Bottom Overlay "9" at -11.786,-37.16 h1; Bottom Overlay "8" at 5.131,-37.16 h1; Bottom Overlay "7" at 22.022,-37.389 h1; Bottom Overlay "6" at -11.811,-25 h1; Bottom Overlay "5" at 5.131,-25 h1; Bottom Overlay "4" at 21.971,-25 h1; Bottom Overlay "3" at -11.659,-13.386 h1; Bottom Overlay "2" at 5.182,-13.208 h1; Bottom Overlay "1" at 22.2,-13.132 h1; Bottom Overlay "C" at -28.1,14.2 h1; Bottom Overlay "B" at 5,14.3 h1; Bottom Overlay "A" at 37.1,14.2 h1